# Altium PCB MiniRobot.PcbDoc
Units mm, origin at the board's own origin, x right, y up, seen from the top; angles counter-clockwise.
Board outline 90 x 85 mm, 2 copper layers (Top Layer, Bottom Layer); 54 components, 48 nets, 197 pads, 64 vias.
Unrouted connection lines stored in the file: 22.
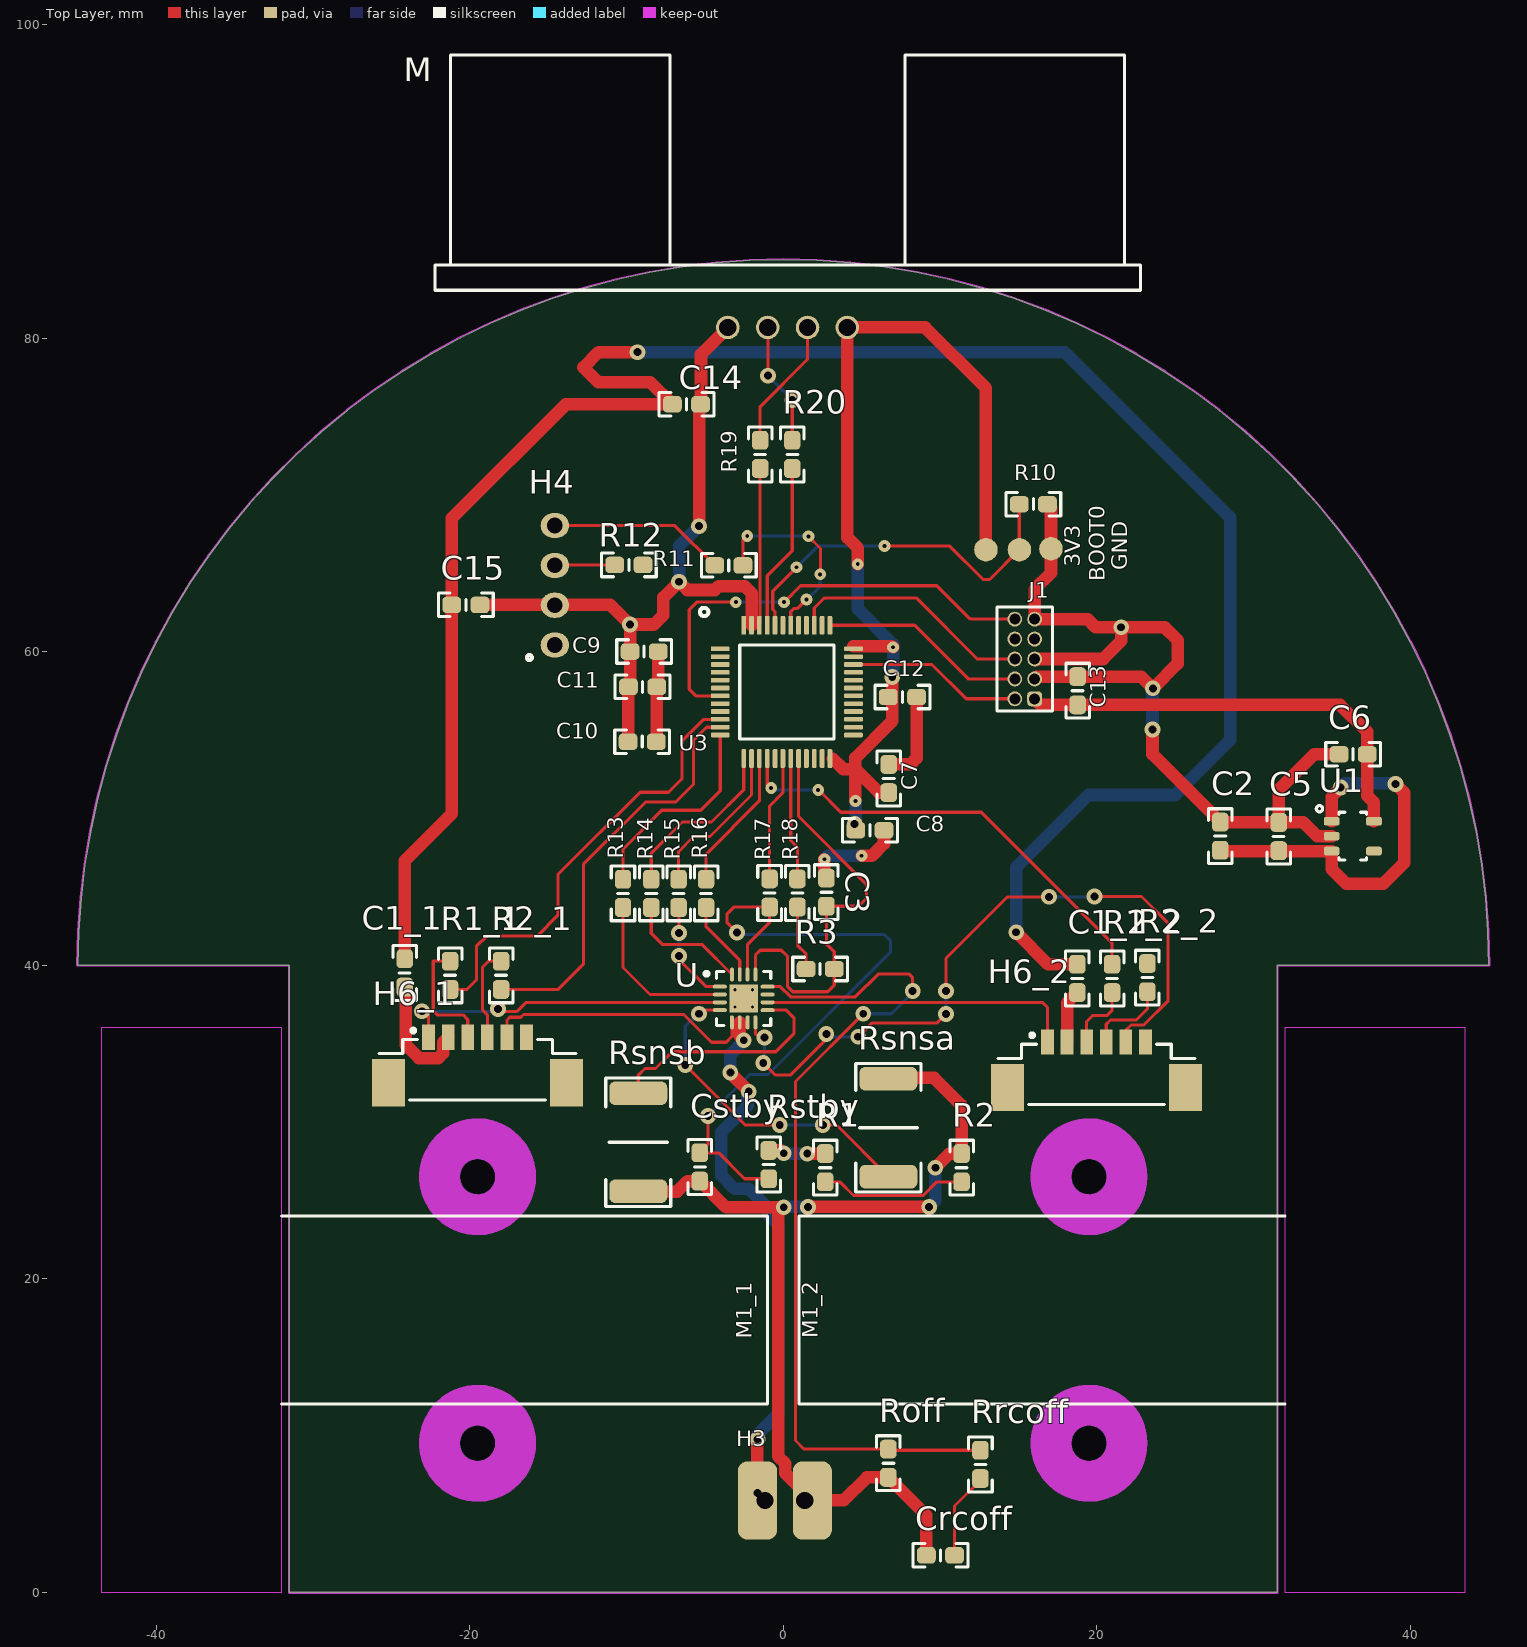
[diagram p0: Top Layer view]
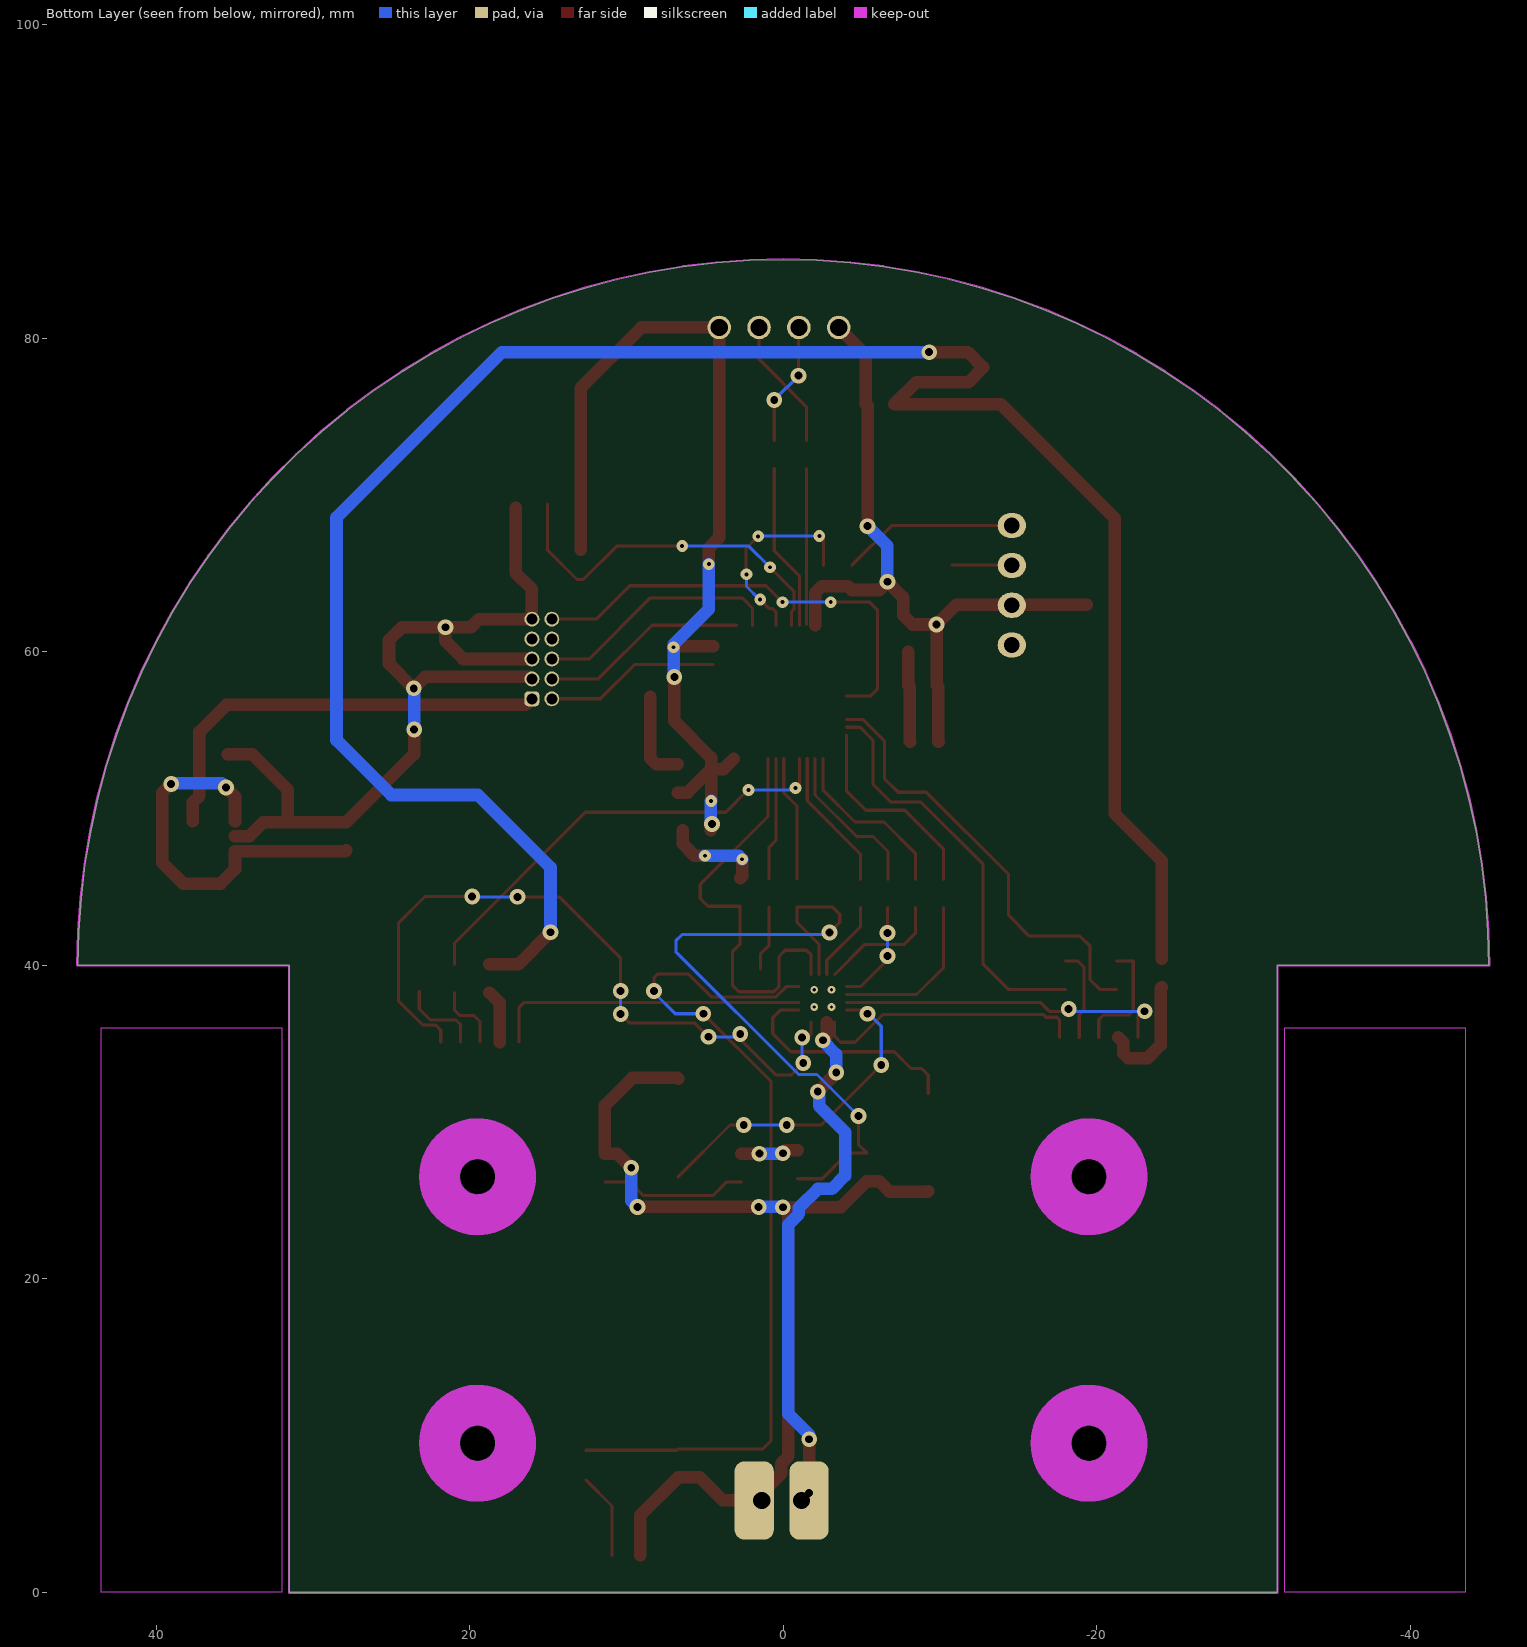
[diagram p1: Bottom Layer view, seen from below]

## Layer stack, top to bottom
Top Solder: solder mask 0.0102, Solder Resist, Dk 3.5
Top Layer: signal copper 0.0356
Dielectric 1: dielectric 0.32, FR-4, Dk 4.8
Bottom Layer: signal copper 0.0356
Bottom Solder: solder mask 0.0102, Solder Resist, Dk 3.5

## Board outline
45,40 44.949,42.141 44.796,44.278 44.542,46.404 44.187,48.516 43.732,50.609 43.177,52.678 42.525,54.718 41.777,56.725 40.933,58.694 39.998,60.62 38.971,62.5 37.856,64.329 36.656,66.103 35.372,67.817 34.009,69.469 32.568,71.054 31.054,72.568 29.469,74.009 27.817,75.372 26.103,76.656 24.329,77.856 22.5,78.971 20.62,79.998 18.694,80.933 16.725,81.777 14.718,82.525 12.678,83.177 10.609,83.732 8.516,84.187 6.404,84.542 4.278,84.796 2.141,84.949 0,85 -2.141,84.949 -4.278,84.796 -6.404,84.542 -8.516,84.187 -10.609,83.732 -12.678,83.177 -14.718,82.525 -16.725,81.777 -18.694,80.933 -20.62,79.998 -22.5,78.971 -24.329,77.856 -26.103,76.656 -27.817,75.372 -29.469,74.009 -31.054,72.568 -32.568,71.054 -34.009,69.469 -35.372,67.817 -36.656,66.103 -37.856,64.329 -38.971,62.5 -39.998,60.62 -40.933,58.694 -41.777,56.725 -42.525,54.718 -43.177,52.678 -43.732,50.609 -44.187,48.516 -44.542,46.404 -44.796,44.278 -44.949,42.141 -45,40 -31.5,40 -31.5,0 31.5,0 31.5,40

## Design rules (kind name [scope] priority, off if disabled: settings)
Clearance [All] p1: gap=0.125
ComponentClearance [All] p1 off: gap=0.254 collisioncheckmode=3 verticalgap=0.254 showdistances=FALSE
HoleSize [All] p1: absolutevalues=TRUE maxlimit=10 minlimit=0.19 maxpercent=80.000 minpercent=20.000
MinimumAnnularRing [All] p1: minimumring=0.076
MinimumSolderMaskSliver [All] p1: minsoldermaskwidth=0.154
PolygonConnect [All] p1: connectstyle=Relief reliefconductorwidth=0.254 reliefentries=4 polygonreliefangle="45 Angle" airgapwidth=0.254
RoomDefinition U_MR_UartConnector [InComponentClass('U_MR_UartConnector')] p1: confinementstyle=ConfineIn formatcopy=TRUE lockcomponents=FALSE outline 37.125,68.4 51.751,68.4 51.751,81.4 37.125,81.4
RoomDefinition U_MR_RangeSensor [InComponentClass('U_MR_RangeSensor')] p2: confinementstyle=ConfineIn formatcopy=TRUE lockcomponents=FALSE outline 45.3,21.598 77.377,21.598 77.377,67.35 45.3,67.35
RoomDefinition U_MR_Power [InComponentClass('U_MR_Power')] p3: confinementstyle=ConfineIn formatcopy=TRUE lockcomponents=FALSE outline 46.142,13.927 60.743,13.927 60.743,20.427 46.142,20.427
RoomDefinition U_MR_Motor_Control [InComponentClass('U_MR_Motor_Control')] p4: confinementstyle=ConfineIn formatcopy=TRUE lockcomponents=FALSE outline -44.276,-22.325 49.425,-22.325 49.425,-4.575 -44.276,-4.575
RoomDefinition RightMotor [InComponentClass('RightMotor')] p5: confinementstyle=ConfineIn formatcopy=TRUE lockcomponents=FALSE outline 46.142,101.231 74.118,101.231 74.118,118.207 46.142,118.207
RoomDefinition LeftMotor [InComponentClass('LeftMotor')] p6: confinementstyle=ConfineIn formatcopy=TRUE lockcomponents=FALSE outline 46.142,82.98 72.143,82.98 72.143,99.956 46.142,99.956
RoutingVias [All] p1: holewidth=0.25 width=0.6 viastyle="Through Hole" minholewidth=0.2 minwidth=0.45 maxholewidth=1 maxwidth=2
SilkToSilkClearance [All] p1: silktosilkclearance=0.154
SilkToSolderMaskClearance [IsPad] p1: minsilkscreentomaskgap=0 clearancetoexposedcopper=TRUE
SolderMaskExpansion SolderMask_Via [IsVia] p1: expansion=-100
SolderMaskExpansion [All] p2: expansion=0.102
Width [All] p1: maxlimit=10 minlimit=0.075 preferedwidth=0.2 minimp=50.000000 maximp=50.000000 favimp=50.000000
24 further rules are at their usual default settings.

## Classes and differential pairs
channel class MR_Motor: LeftMotor RightMotor
component class U_MR_Power: C5 C6 H3 U1
component class RightMotor: C1_2 H6_2 M1_2 R1_2 R2_2
component class LeftMotor: C1_1 H6_1 M1_1 R1_1 R2_1
component class U_MR_Mcu: 3V3 BOOT0 C7 C8 C9 C10 C11 C12 C13 GND J1 R10 R11 R13 R14 R15 R16 R17 R18 R19 U3
component class U_MR_Motor_Control: C2 C3 Crcoff Cstby R1 R2 R3 Roff Rrcoff Rsnsa Rsnsb Rstby U
component class U_MR_RangeSensor: C14 M R20
component class U_MR_UartConnector: C15 H4 R12

## Components (designator, comment, footprint, x,y, rotation, side; value= is the part's Value field where it differs from the comment)
3V3 "TestPoint" ROUND_TEST_POINT 12.925,66.5 r180 top
BOOT0 "TestPoint" ROUND_TEST_POINT 15.063,66.5 r270 top
C1_1 "CerCap" 0603_CAP_LD -24.15,39.5 r90 top (schematic designator C1)
C1_2 "CerCap" 0603_CAP_LD 18.75,39.15 r90 top (schematic designator C1)
C2 "CerCap" 0603_CAP_LD 27.875,48.225 r270 top
C3 "CerCap" 0603_CAP_LD 2.75,44.65 r270 top
C5 "CerCap" 0603_CAP_LD 31.6,48.2 r270 top
C6 "CerCap" 0603_CAP_LD 36.35,53.45 r0 top
C7 "CerCap" 0603_CAP_LD 6.725,51.9 r270 top
C8 "CerCap" 0603_CAP_LD 5.525,48.6 r180 top
C9 "CerCap" 0603_CAP_LD -8.875,60 r0 top
C10 "CerCap" 0603_CAP_LD -9,54.25 r0 top
C11 "CerCap" 0603_CAP_LD -8.975,57.75 r0 top
C12 "CerCap" 0603_CAP_LD 7.6,57.1 r180 top
C13 "CerCap" 0603_CAP_LD 18.775,57.5 r270 top
C14 "CerCap" 0603_CAP_LD -6.175,75.775 r180 top
C15 "CerCap" 0603_CAP_LD -20.25,62.975 r180 top
Crcoff "CerCap" 0603_CAP_LD 10.025,2.35 r0 top
Cstby "CerCap" 0603_CAP_LD -5.325,27.125 r90 top
GND "TestPoint" ROUND_TEST_POINT 17.075,66.55 r90 top
H3 "CustomBatteryConnector" CUSTOMBATTERYCONNECTOR 0.105,5.85 r0 top
H4 "Header" "HE14 1x4 Straight" -14.575,64.225 r90 top
H6_1 "Header" HEADER_1X6_PICOBLADE_653106124022 -19.5,33.325 r0 top (schematic designator H6)
H6_2 "Header" HEADER_1X6_PICOBLADE_653106124022 19.975,33.025 r0 top (schematic designator H6)
J1 "Debug" 62201021121 15.4,59.525 r90 top
M "Ultrasonic Range Sensor" HC-SR04 0.275,80.675 r0 top
M1_1 "MotorGroup" MOTORGROUP -1,18 r0 top locked (schematic designator M1)
M1_2 "MotorGroup" MOTORGROUP 1,18 r180 top locked (schematic designator M1)
R1 "Resistor" 0603_RES_LD 2.675,27.075 r90 top
R1_1 "Resistor" 0603_RES_LD -21.25,39.35 r90 top (schematic designator R1)
R1_2 "Resistor" 0603_RES_LD 20.975,39.15 r270 top (schematic designator R1)
R2 "Resistor" 0603_RES_LD 11.375,27.075 r270 top
R2_1 "Resistor" 0603_RES_LD -18,39.35 r90 top (schematic designator R2)
R2_2 "Resistor" 0603_RES_LD 23.225,39.2 r270 top (schematic designator R2)
R3 "Resistor" 0603_RES_LD 2.35,39.75 r0 top
R10 "Resistor" 0603_RES_LD 15.95,69.4 r180 top
R11 "Resistor" 0603_RES_LD -3.475,65.495 r0 top
R12 "Resistor" 0603_RES_LD -9.85,65.525 r180 top
R13 "Resistor" 0603_RES_LD -10.225,44.575 r90 top
R14 "Resistor" 0603_RES_LD -8.425,44.575 r90 top
R15 "Resistor" 0603_RES_LD -6.675,44.575 r90 top
R16 "Resistor" 0603_RES_LD -4.925,44.575 r90 top
R17 "Resistor" 0603_RES_LD -0.875,44.6 r90 top
R18 "Resistor" 0603_RES_LD 0.9,44.6 r90 top
R19 "Resistor" 0603_RES_LD -1.475,72.575 r270 top
R20 "Resistor" 0603_RES_LD 0.575,72.575 r90 top
Roff "Resistor" 0603_RES_LD 6.7,8.225 r90 top
Rrcoff "Resistor" 0603_RES_LD 12.575,8.15 r90 top
Rsnsa "Resistor" 2512_RES_LD 6.7,29.625 r270 top
Rsnsb "Resistor" 2512_RES_LD -9.25,28.7 r90 top
Rstby "Resistor" 0603_RES_LD -0.925,27.275 r90 top
U "Dual Brush Motor Driver" QFN-STSPIN240 -2.525,37.875 r0 top
U1 "Low noise, Low Iq LDO" LP5907 36.325,48.225 r0 top
U3 "Microcontroller" STM32_LQFP48 0.225,57.425 r0 top

## Footprints (in the part's own frame and the unit in brackets; to place one, negate y for a bottom-side part, rotate by r counter-clockwise, add the part's x,y. Pads: shape width x height; smd on the part's side, far side on the other; paste and mask are expansions set on the pad)
0603_CAP_LD [mm] "0603 Capacitor Low Density"
  rrect50% 1.2x1.05 smd: 1(-0.9,0) 2(0.9,0)
  silkscreen extent -1.75,-0.75 1.75,0.75
0603_RES_LD [mm] "0603 Resistor Low Density"
  rrect50% 1.2x1.05 smd: 1(-0.9,0) 2(0.9,0)
  silkscreen extent -1.75,-0.75 1.75,0.75
2512_RES_LD [mm] "2512 Low Density Resistor"
  rrect50% 1.5x3.7 smd: 1(-3.125,0) 2(3.125,0)
  silkscreen extent -4.1,-2.07 4.1,2.07
62201021121 [mm] "Pin Header, pitch 1.27 mm, THT, Vertical, dual row, 10p"
  rrect50% 0.95x0.95 hole 0.7: 1(-2.54,-0.635)
  round 0.95 hole 0.7: 2(-2.54,0.635) 3(-1.27,-0.635) 4(-1.27,0.635) 5(0,-0.635) 6(0,0.635) 7(1.27,-0.635) 8(1.27,0.635) 9(2.54,-0.635) 10(2.54,0.635)
  silkscreen extent -3.32,-1.78 3.32,1.78, body extent -3.17,-1.7 3.18,1.7, height 5.33
CUSTOMBATTERYCONNECTOR [mm] "CustomBatteryConnector"
  rrect50% 2.5x5 smd paste-100: +(-1.75,0) -(1.75,0)
  rrect50% 2.5x5 smd far side paste-100: +(-1.75,0) -(1.75,0)
  round 1.5 hole 1.1 unplated paste-100: +(-1.27,0) -(1.27,0)
HC-SR04 [mm] "HC-SR04"
  round 1.5 hole 1.1 unplated: 1(-3.81,0) 2(-1.27,0) 3(1.27,0) 4(3.81,0)
  silkscreen extent -22.5,2.38 22.5,17.38, body extent -22.72,-0.3 22.72,17.49, height 20
"HE14 1x4 Straight" [mm] "Connector HE14 Straight 1x4"
  oval 1.6x1.8 hole 1 mask+0.102: 1(-3.81,0) 2(-1.27,0) 3(1.27,0) 4(3.81,0)
  silkscreen extent -4.77,1.47 -4.45,1.78, body extent -5.08,-1.27 5.08,1.27, height 9.5
HEADER_1X6_PICOBLADE_653106124022 [mm] "1.25mm SMT Male Vertical Shrouded Header, 6p"
  rect 0.81x1.6 smd: 1(-3.125,2.07) 2(-1.875,2.07) 3(-0.625,2.07) 4(0.625,2.07) 5(1.875,2.07) 6(3.125,2.07)
  rect 2.1x3 smd: ""(-5.675,-0.83) ""(5.675,-0.83)
  silkscreen extent -6.27,-1.92 6.27,2.62
LP5907 [mm] "LP5907 SOT23"
  rrect50% 1x0.55 smd mask+0.102: 1(-1.35,0.95) 2(-1.35,0) 3(-1.35,-0.95) 4(1.35,-0.95) 5(1.35,0.95)
  silkscreen extent -2.33,-1.52 0.88,1.95
MOTORGROUP [mm]
  round 0 hole 2.2 unplated paste+0 mask+0: 21(-18.5,8.5) 22(-18.5,-8.5)
  Keep-Out Layer circle w2.6: c-18.5,-8.5 r2.425
  Keep-Out Layer circle w2.6: c-18.5,8.5 r2.425
  Keep-Out Layer region: -31,-18 -31,18 -42.5,18 -42.5,-18
  silkscreen extent -31,-6 0,6
QFN-STSPIN240 [mm] "QFN, 16-Leads, Body 3,00x3,00mm, Pitch 0,50mm, Thermal Pad 1,80x1,80mm, IPC Low Density"
  oval 0.9x0.25 smd: 1(-1.525,0.75) 2(-1.525,0.25) 3(-1.525,-0.25) 4(-1.525,-0.75) 9(1.525,-0.75) 10(1.525,-0.25) 11(1.525,0.25) 12(1.525,0.75)
  oval 0.25x0.9 smd: 5(-0.75,-1.525) 6(-0.25,-1.525) 7(0.25,-1.525) 8(0.75,-1.525) 13(0.75,1.525) 14(0.25,1.525) 15(-0.25,1.525) 16(-0.75,1.525)
  rect 1.8x1.8 smd: 17(0,0)
  silkscreen extent -2.5,-1.73 1.73,1.73
ROUND_TEST_POINT [mm] "Small round test point"
  round 1.5 smd paste-100: 1(0,0)
STM32_LQFP48 [mm]
  rrect50% 1.2x0.3 smd: 1(-4.25,2.75) 2(-4.25,2.25) 3(-4.25,1.75) 4(-4.25,1.25) 5(-4.25,0.75) 6(-4.25,0.25) 7(-4.25,-0.25) 8(-4.25,-0.75) 9(-4.25,-1.25) 10(-4.25,-1.75) 11(-4.25,-2.25) 12(-4.25,-2.75) 25(4.25,-2.75) 26(4.25,-2.25) 27(4.25,-1.75) 28(4.25,-1.25) 29(4.25,-0.75) 30(4.25,-0.25) 31(4.25,0.25) 32(4.25,0.75) 33(4.25,1.25) 34(4.25,1.75) 35(4.25,2.25) 36(4.25,2.75)
  rrect50% 0.3x1.2 smd: 13(-2.75,-4.25) 14(-2.25,-4.25) 15(-1.75,-4.25) 16(-1.25,-4.25) 17(-0.75,-4.25) 18(-0.25,-4.25) 19(0.25,-4.25) 20(0.75,-4.25) 21(1.25,-4.25) 22(1.75,-4.25) 23(2.25,-4.25) 24(2.75,-4.25) 37(2.75,4.25) 38(2.25,4.25) 39(1.75,4.25) 40(1.25,4.25) 41(0.75,4.25) 42(0.25,4.25) 43(-0.25,4.25) 44(-0.75,4.25) 45(-1.25,4.25) 46(-1.75,4.25) 47(-2.25,4.25) 48(-2.75,4.25)
  silkscreen extent -5.54,-3 3,5.37

## Part data
C1_1 C1_2 C2 C3 C5 C6 C7 C8 C9 C10 C11 C12 C13 C14 C15 Crcoff Cstby: "Ceramic Capacitor"
H3: library part BatteryConnector, "Custom Battery Connector"
H4: library part Header_4x1, "Header 4x1 PIns"
H6_1 H6_2: library part Header_6x1, "Header 6x1 Pins"
J1: library part Cortex_10x2, "Cortex 10 pins Debug Connector"
M: library part HC-SR04
M1_1 M1_2: library part Motor
U: library part STSPIN240, "ST Dual Motor Driver"
U1: library part LP5907, "LP5907 Low Noise Low Iq LDO"
U3: library part STM32F303CBT6, "STM32F303 Microcontroller"

## Via types
v1: diameter 1, hole 0.5, Top Layer to Bottom Layer, 45 vias
v2: diameter 0.75, hole 0.25, Top Layer to Bottom Layer, 15 vias
v3: diameter 0.5, hole 0.2, Top Layer to Bottom Layer, 4 vias

## Nets (pads, with @x,y where several pads share a name; then routed paths per layer and width w, separated by ;. In a path a pad name is that pad's centre, name@x,y a point inside that pad or via, vN(x,y) a via of type N, cw(c..) or ccw(c..) an arc to the next point about the centre after c; other vN are vias at no path point)
3V3: 3V3.1 C6.2 C7.2 C8.2 C9.2 C10.2 C11.2 C12.2 C13.2 J1.1 M.4 R1.2 Rstby.2 U1.5 U3.1 U3.9 U3.24 U3.36 U3.48 | length 99.6
  Top Layer w0.8: C10.2 -8.075,54.275 C11.2 -7.975,57.85 C9.2 ; Rstby.2 -0.149,28.175 v1(0.025,28.001) ; v1(1.525,27.975) R1.2 ; 3.15,53.175 3.825,52.5 4.6,52.5 ; 4.475,60.35 6.925,60.35 v2(7,60.275) ; v1(4.55,49.002) 4.625,48.928 C8.2 ; v2(4.6,50.475) 4.6,52.5 ; v2(4.75,65.575) 4.75,66.6 4.085,67.265 M.4 9.05,80.675 12.925,76.8 3V3.1 ; C7.2 6.1,51 4.6,52.5 ; v1(6.95,58.375) 6.95,55.575 4.6,53.225 4.6,52.5 ; J1.1 16.42,56.6 C13.2 35.525,56.6 37.25,54.875 C6.2 37.25,50.8 37.675,50.375 U1.5
  Bottom Layer w0.8: v1(0.025,28.001) 0.051,27.975 v1(1.525,27.975) ; v1(4.55,49.002) 4.625,49.077 4.625,50.45 v2(4.6,50.475) ; v2(4.75,65.575) 4.75,62.7 7,60.45 v2(7,60.275) 7,58.425 v1(6.95,58.375)
BOOT0: BOOT0.1 R10.2 U3.44 | length 23.7
  Top Layer w0.2: U3.44 -0.525,62.55 -0.675,62.7 -0.675,63.85 v2(0.85,65.375) ; v2(6.45,66.725) 10.625,66.725 12.75,64.6 13.162,64.6 BOOT0.1 ; BOOT0.1@15.05,66.513 R10.2
  Bottom Layer w0.2: v2(0.85,65.375) 2.2,66.725 v2(6.45,66.725)
GND: C1_1.1 C1_2.1 C2.1 C3.1 C5.1 C6.1 C7.1 C8.1 C9.1 C10.1 C11.1 C12.1 C13.1 C14.1 C15.1 Crcoff.1 Cstby.1 GND.1 H3.- H4.2 H6_1.2 H6_2.2 J1.3 J1.5 J1.9 M.1 R2.1 R10.1 Roff.1 Rsnsa.1 Rsnsb.1 U1.2 U3.8 U3.23 U3.35 U3.47 U.7 | length 195
  Top Layer w0.8: C1_1.1 -24.076,38.526 -24.076,34.899 -23.247,34.07 -22.003,34.07 -21.695,34.378 -21.695,35.075 H6_1.2 ; C15.1 -11.025,62.975 v1(-9.775,61.725) ; C10.1 -9.875,54.275 C11.1 -9.775,57.85 C9.1 v1(-9.775,61.725) ; Rsnsb.1 -9.225,25.55 -6.775,25.55 -6.1,26.225 Cstby.1 -3.651,24.551 v1(0.025,24.551) 0.05,24.526 -0.325,24.151 -0.325,8.656 0.13,8.201 0.13,7.575 1.855,5.85 3.85,5.85 5.325,7.325 Roff.1 9.125,4.9 Crcoff.1 ; v1(-5.375,68) -5.375,75.675 C14.1 -5.25,75.8 -5.25,78.96 M.1 ; U3.47 -2.025,63.725 -2.475,64.175 -4.125,64.175 -4.375,63.925 -6.125,63.925 v1(-6.65,64.45) -7.65,63.45 -7.65,62.325 -8.25,61.725 v1(-9.775,61.725) ; v1(1.575,24.575) v1(9.3,24.575) ; v2(2.625,46.752) 2.625,45.675 C3.1 ; v2(5,46.975) 5.65,46.975 6.425,47.75 C8.1 ; Rsnsa.1 6.75,32.8 9.625,32.8 11.375,31.05 R2.1 10.6,27.975 v1(9.7,27.075) ; C7.1 8.1,52.8 8.5,53.2 C12.1 ; J1.3 16.18,58.4 C13.1 22.825,58.4 v1(23.575,57.65) 25.15,59.225 25.15,60.725 24.325,61.55 v1(21.55,61.55) ; J1.5@16.11,59.45 J1.5 20.4,59.525 21.55,60.675 v1(21.55,61.55) ; R10.1@17.075,69.175 GND.1 17.075,65.025 16.035,63.985 J1.9 19.41,62.065 19.925,61.55 v1(21.55,61.55) ; H6_2.2 18.1,37.6 C1_2.1 ; v1(23.55,55.025) 23.55,53.45 C2.1 27.9,49.1 C5.1 ; U1.2 34.05,48.225 33.175,49.1 C5.1 ; C6.1 33.875,53.45 31.6,51.175 C5.1
  Bottom Layer w0.8: v1(-6.65,64.45) -6.625,64.475 -6.625,66.75 v1(-5.375,68) ; v1(0.025,24.551) 0.049,24.575 v1(1.575,24.575) ; v2(2.625,46.752) 2.627,46.752 2.85,46.975 v2(5,46.975) ; v1(9.3,24.575) 9.7,24.975 v1(9.7,27.075) ; v1(23.55,55.025) 23.55,57.625 v1(23.575,57.65)
NetC3_2: C3.2 R3.2 U3.20 U.13 | length 27.5
  Top Layer w0.2: U.13 -1.775,40.65 -1.475,40.95 -0.125,40.95 0.275,40.55 0.275,38.625 0.6,38.3 1.625,38.3 2.825,38.3 3.25,38.725 R3.2 3.25,40.85 2.75,41.35 C3.2 4.8,43.75 5.3,44.25 5.3,45.15 0.975,49.475 U3.20
NetCrcoff_2: Crcoff.2 Rrcoff.1 | length 5.5
  Top Layer w0.2: Crcoff.2 10.925,5.5 Rrcoff.1@12.575,7.15
NetCstby_2: Cstby.2 R17.1 Rstby.1 U.14 | length 43.7
  Top Layer w0.2: v1(-4.8,30.375) -4.8,28.55 Cstby.2 -4.125,28.025 -2.475,26.375 Rstby.1 ; v1(-2.95,42.075) -3.6,42.725 -3.6,43.25 -3.15,43.7 R17.1 -0.875,42.725 -2.275,41.325 U.14
  Bottom Layer w0.2: v1(-4.8,30.375) -2.15,33.025 -0.975,33.025 6.85,40.85 6.85,41.55 6.45,41.95 -2.95,41.95 v1(-2.95,42.075)
NetH4_3: H4.3 R12.2 | length 3.8
  Top Layer w0.2: H4.3 -14.545,65.525 R12.2
NetH4_4: H4.4 R11.1 | length 11.3
  Top Layer w0.2: H4.4 -6.915,68.035 R11.1
NetH6_1_1: H6_1.1 U.3 | length 21.3
  Top Layer w0.2: v1(-23.051,37.052) -22.978,37.125 -22.625,36.772 H6_1.1 ; v1(-18.201,37.202) -18.049,37.05 -16.975,37.05 -16.4,37.625 U.3
  Bottom Layer w0.2: v1(-23.051,37.052) -23.049,37.05 -18.353,37.05 v1(-18.201,37.202)
NetH6_1_3: H6_1.3 R1_1.2 | length 7.8
  Top Layer w0.2: R1_1.2 -22.325,40.25 -22.325,37.075 -22.075,36.825 -20.425,36.825 -20.125,36.525 H6_1.3
NetH6_1_4: H6_1.4 R2_1.2 | length 5.9
  Top Layer w0.2: H6_1.4 -18.875,36.825 -19.175,37.125 -19.175,39.875 -18.8,40.25 R2_1.2
NetH6_1_5: H6_1.5 U.5 | length 17.4
  Top Layer w0.2: H6_1.5 -17.625,36.5 -17.45,36.675 -16.75,36.675 -16.575,36.85 -6.35,36.85 -4.575,35.075 -3.65,35.075 -3.275,35.45 U.5
NetH6_2_1: H6_2.1 U.10 | length 20.2
  Top Layer w0.2: U.10 3.675,37.625 16.525,37.625 16.85,37.3 H6_2.1
NetH6_2_3: H6_2.3 R1_2.2 | length 4.4
  Top Layer w0.2: H6_2.3 19.35,36.4 19.725,36.775 20.625,36.775 20.975,37.125 R1_2.2
NetH6_2_4: H6_2.4 R2_2.2 | length 5.3
  Top Layer w0.2: H6_2.4 20.6,36.225 20.875,36.5 22.525,36.5 23.225,37.2 R2_2.2
NetH6_2_5: H6_2.5 U.8 | length 46.5
  Top Layer w0.2: U.8 -1.775,35.625 -1.35,35.2 -1.2,35.35 v1(-1.2,35.377) ; v1(-1.275,33.75) -0.525,33 0.475,33 2.875,35.4 2.875,35.477 v1(2.75,35.602) ; v1(4.775,35.425) 5.65,36.3 9.8,36.3 v1(10.375,36.875) ; v1(10.375,38.35) 10.375,40.425 14.3,44.35 v1(16.95,44.35) ; v1(19.85,44.375) 22.85,44.375 24.55,42.675 24.55,37.725 23,36.175 22.175,36.175 21.85,35.85 H6_2.5
  Bottom Layer w0.2: v1(-1.275,33.75) -1.2,33.825 v1(-1.2,35.377) ; v1(2.75,35.602) 2.927,35.425 v1(4.775,35.425) ; v1(10.375,36.875) v1(10.375,38.35) ; v1(16.95,44.35) 19.875,44.35 v1(19.85,44.375)
NetM_2: M.2 R20.2 | length 7.9
  Top Layer w0.2: M.2 -0.975,80.655 v1(-0.975,77.6) ; R20.2 v1(0.575,76.05)
  Bottom Layer w0.2: M.2 M.2@-0.975,80.655 ; v1(-0.975,77.6) v1(0.575,76.05)
NetM_3: M.3 R19.1 | length 8.5
  Top Layer w0.2: R19.1 -1.475,75.625 1.545,78.645 M.3
NetR1_1: R1.1 R2.2 U.11 | length 9.4
  Top Layer w0.2: R1.1 3.6,26.175 4.475,25.3 8.925,25.3 9.8,26.175 R2.2
NetR1_1_1: R1_1.1 U3.10 | length 28.5
  Top Layer w0.2: R1_1.1 -20.175,38.45 -19.575,39.05 -19.575,41.2 -18.925,41.85 -15.7,41.85 -14.375,43.175 -14.375,45.775 -9.125,51.025 -7.325,51.025 -6.45,51.9 -6.45,54.3 -5.075,55.675 U3.10
NetR1_2_1: R1_2.1 U3.16 | length 29.3
  Top Layer w0.2: U3.16 -1.025,51.475 -0.853,51.303 v2(-0.775,51.303) ; v2(2.225,51.175) 2.225,51.2 3.675,49.75 12.625,49.75 20.975,41.4 R1_2.1
  Bottom Layer w0.2: v2(-0.775,51.303) -0.75,51.303 -0.623,51.175 v2(2.225,51.175)
NetR2_1_1: R2_1.1 U3.11 | length 26.3
  Top Layer w0.2: R2_1.1 -14.35,38.45 -12.75,40.05 -12.75,46.425 -8.775,50.4 -6.85,50.4 -5.725,51.525 -5.725,54.35 -4.9,55.175 U3.11
NetR2_2_1: R2_2.1 U3.17
NetR3_1: R3.1 R18.1 | length 4.2
  Top Layer w0.2: R18.1 0.9,41.275 1.45,40.725 R3.1
NetR11_2: R11.2 U3.42 | length 12.8
  Top Layer w0.2: R11.2 -2.575,67.1 v2(-2.3,67.375) ; U3.42 0.475,62.55 0.663,62.737 0.884,62.737 v2(1.475,63.328) ; v2(1.6,67.35) 2.375,66.575 2.375,64.925 v2(2.35,64.925)
  Bottom Layer w0.2: v2(-2.3,67.375) 1.6,67.375 v2(1.6,67.35) ; v2@1.528,63.328 2.35,64.15 v2(2.35,64.925)
NetR12_1: R12.1 U3.43
NetR13_1: R13.1 U.2 | length 10.7
  Top Layer w0.2: R13.1 -10.225,39.85 -8.5,38.125 U.2
NetR13_2: R13.2 U3.12 | length 13.2
  Top Layer w0.2: R13.2 -10.225,47.4 -7.75,49.875 -5.275,49.875 -4.025,51.125 U3.12
NetR14_1: R14.1 U.16 | length 7.9
  Top Layer w0.2: R14.1 -8.425,42.025 -7.725,41.325 -5.2,41.325 U.16
NetR14_2: R14.2 U3.13 | length 11.2
  Top Layer w0.2: R14.2 -8.425,47.125 -6.425,49.125 -4.575,49.125 -2.525,51.175 U3.13
NetR15_1: R15.1 U.1 | length 6.7
  Top Layer w0.2: R15.1 -6.65,43.65 v1(-6.65,42.052) ; v1(-6.65,40.577) -6.65,40.35 -4.925,38.625 U.1
  Bottom Layer w0.2: v1(-6.65,40.577) v1@-6.65,40.775 ; v1@-6.65,40.776 v1@-6.65,42.052
NetR15_2: R15.2 U3.14 | length 10.2
  Top Layer w0.2: R15.2 -6.675,47.25 -5.725,48.2 -4.675,48.2 -2.025,50.85 U3.14
NetR16_1: R16.1 U.15 | length 5.2
  Top Layer w0.2: R16.1 -4.925,42.45 -2.775,40.3 U.15
NetR16_2: R16.2 U3.15 | length 9.1
  Top Layer w0.2: R16.2 -4.925,47.075 -1.525,50.475 U3.15
NetR17_2: R17.2 U3.18 | length 8
  Top Layer w0.2: R17.2 -0.875,50.15 -0.025,51 U3.18
NetR18_2: R18.2 U3.19 | length 7.9
  Top Layer w0.2: U3.19 0.475,47.95 0.9,47.525 R18.2
NetR19_2: R19.2 U3.46 | length 10
  Top Layer w0.2: U3.46@-1.475,61.725 R19.2
NetR20_1: R20.1 U3.45 | length 10.7
  Top Layer w0.2: U3.45 -1.025,64.825 0.575,66.425 R20.1
NetRoff_2: Roff.2 Rrcoff.2 U.12 | length 55.9
  Top Layer w0.2: U.12 -0.185,38.625 0.465,37.975 4.6,37.975 6.05,39.425 8.025,39.425 8.25,39.2 v1(8.25,38.352) ; v1(5.1,36.9) 0.775,32.575 0.775,9.675 1.325,9.125 Roff.2 6.775,9.05 Rrcoff.2
  Bottom Layer w0.2: v1(5.1,36.9) 6.9,36.9 8.25,38.25 v1(8.25,38.352)
NetRsnsa_2: Rsnsa.2 U.4 | length 21.1
  Top Layer w0.2: v1(-6.25,33.625) -2.425,29.8 v1(-0.225,29.8) ; v1(-5.375,36.9) -5.375,37 -5.25,37.125 U.4 ; v1(2.525,29.8) 3.4,29.8 Rsnsa.2
  Bottom Layer w0.2: v1(-6.25,33.625) -6.25,36.1 -5.45,36.9 v1(-5.375,36.9) ; v1(-0.225,29.8) v1(2.525,29.8)
NetRsnsb_2: Rsnsb.2 U.9 | length 15.1
  Top Layer w0.2: Rsnsb.2 -9.25,32.975 -8.825,33.4 -8.148,33.4 -7.073,34.475 -0.477,34.475 0.675,35.627 0.675,36.65 0.2,37.125 U.9
nRST: J1.10 U3.7 | length 29.5
  Top Layer w0.2: U3.7 -5.575,57.175 -6,57.6 -6,62.675 -5.525,63.15 v2(-3.025,63.15) ; v2(0.05,63.15) 1.1,64.2 9.8,64.2 11.935,62.065 J1.10
  Bottom Layer w0.2: v2(-3.025,63.15) v2(0.05,63.15)
SWCLK: J1.4 U3.37 | length 13.2
  Top Layer w0.2: U3.37 8.375,61.675 11.795,58.255 J1.4
SWDIO: J1.2 U3.34 | length 11.2
  Top Layer w0.2: U3.34 9.475,59.175 11.665,56.985 J1.2
SWO: J1.6 U3.39 | length 15.8
  Top Layer w0.2: U3.39 1.975,62.775 2.625,63.425 8.475,63.425 12.375,59.525 J1.6
VBATT: C2.2 C5.2 H3.+ H4.1 U1.1 U1.3 U.6 | length 60.1
  Top Layer w0.8: v1(-3.375,33.15) -3.375,33.101 v1(-2.2,31.927) ; U.6 -2.775,35.452 v1(-2.525,35.202) ; v1(-1.65,6.335) v1(-1.65,9.75) ; C2.2 27.925,47.275 U1.3 34.975,46.125 35.9,45.2 38.275,45.2 39.6,46.525 39.6,51 v1(39.05,51.55) ; U1.1 34.975,50.75 v1(35.55,51.325)
  Bottom Layer w0.8: v1(-3.375,33.15) -3.375,34.3 -2.525,35.15 v1(-2.525,35.202) ; v1(-2.2,31.927) -2.283,31.844 -2.283,31.017 -3.95,29.35 -3.95,26.575 -3.1,25.725 -2.2,25.725 -1,24.525 -1,24.127 -0.325,23.452 -0.325,11.375 -1.65,10.05 v1(-1.65,9.75) ; v1(-1.65,6.335) H3.+@-1.165,5.85 ; v1(35.55,51.325) 35.825,51.6 39.05,51.6 v1(39.05,51.55)
VCC: C1_1.2 C1_2.2 C14.2 C15.2 | length 139.2
  Top Layer w0.8: C1_1.2 -24.15,46.65 -21.15,49.65 C15.2 -21.15,68.5 -13.875,75.775 C14.2 -8.475,77.175 -11.8,77.175 -12.75,78.125 -11.775,79.1 v1(-9.3,79.1) ; v1(14.85,42.1) 16.9,40.05 C1_2.2
  Bottom Layer w0.8: v1(-9.3,79.1) 17.95,79.1 28.5,68.55 28.5,54.35 25,50.85 19.475,50.85 14.85,46.225 v1(14.85,42.1)
VRATT: H6_1.6 H6_2.6
pads on no net: H6_1. H6_2. J1.7 J1.8 M1_1.21 M1_1.22 M1_2.21 M1_2.22 U1.4 U3.2 U3.3 U3.4 U3.5 U3.6 U3.21 U3.22 U3.25 U3.26 U3.27 U3.28 U3.29 U3.30 U3.31 U3.32 U3.33 U3.38 U3.40 U3.41 U.17
copper on no net:
  other v3: -3.075,37.325 -1.975,37.325 -3.075,38.425 -1.975,38.425

## Keep-outs
Keep-Out Layer:
  lines w0.1: 44.999,42.141 ccw(c44.949,42.141) 44.999,42.142 ; -45.05,40.001 ccw(c-45,40) -45,39.95 ; -45.05,40.002 ccw(c-45,40) -45,39.95 ; -45.05,40.002 -44.999,42.142 ; -45.05,40.001 -45.05,40.002 ; -45,39.95 -31.55,39.95 -31.55,0 ; -44.999,42.142 cw(c-44.949,42.141) -44.999,42.145 ; -44.999,42.142 cw(c-44.949,42.141) -44.999,42.145 ; -44.999,42.142 -44.999,42.142 ; -44.999,42.145 -44.846,44.281 ; -44.846,44.281 cw(c-44.796,44.278) -44.846,44.283 ; -44.846,44.281 cw(c-44.796,44.278) -44.846,44.283 ; -44.846,44.283 -44.592,46.41 ; -44.592,46.41 cw(c-44.542,46.404) -44.591,46.413 ; -44.592,46.41 cw(c-44.542,46.404) -44.591,46.412 ; -44.591,46.413 -44.236,48.524 ; -44.591,46.412 -44.591,46.413 ; -44.236,48.525 cw(c-44.187,48.516) -44.236,48.527 ; -44.236,48.524 cw(c-44.187,48.516) -44.236,48.527 ; -44.236,48.524 -44.236,48.525 ; -44.236,48.527 ccw(c-44.187,48.516) -44.236,48.527 ; -44.236,48.527 -43.78,50.62 ; -44.236,48.527 -44.236,48.527 ; -44.236,48.527 -44.236,48.527 ; -43.78,50.62 cw(c-43.732,50.609) -43.78,50.622 ; -43.78,50.62 ccw(c-43.732,50.609) -43.78,50.62 ; -43.78,50.62 cw(c-43.732,50.609) -43.78,50.622 ; -43.78,50.62 -43.78,50.62 ; -43.78,50.62 -43.78,50.62 ; -43.78,50.622 ccw(c-43.732,50.609) -43.78,50.622 ; -43.78,50.622 -43.226,52.691 ; -43.78,50.622 -43.78,50.622 ; -43.78,50.622 -43.78,50.622 ; -43.226,52.691 cw(c-43.177,52.678) -43.225,52.693 ; -43.226,52.691 ccw(c-43.177,52.678) -43.226,52.691 ; -43.226,52.691 cw(c-43.177,52.678) -43.225,52.693 ; -43.226,52.691 -43.226,52.691 ; -43.226,52.691 -43.226,52.691 ; -43.225,52.693 -42.573,54.733 ; -42.573,54.733 cw(c-42.525,54.718) -42.572,54.735 ; -42.573,54.733 cw(c-42.525,54.718) -42.572,54.736 ; -42.572,54.736 ccw(c-42.525,54.718) -42.572,54.735 ; -42.572,54.736 -41.824,56.742 ; -42.572,54.736 -42.572,54.736 ; -42.572,54.735 -42.572,54.736 ; -41.823,56.742 cw(c-41.777,56.725) -41.823,56.744 ; -41.823,56.742 ccw(c-41.777,56.725) -41.823,56.742 ; -41.823,56.742 cw(c-41.777,56.725) -41.823,56.744 ; -41.823,56.742 -41.823,56.742 ; -41.824,56.742 -41.823,56.742 ; -41.823,56.744 -40.979,58.713 ; -40.979,58.713 cw(c-40.933,58.694) -40.979,58.715 ; -40.979,58.713 cw(c-40.933,58.694) -40.978,58.716 ; -40.979,58.715 cw(c-40.933,58.694) -40.978,58.716 ; -40.979,58.715 -40.978,58.716 ; -40.978,58.716 -40.043,60.642 ; -40.978,58.716 -40.978,58.716 ; -40.043,60.642 cw(c-39.998,60.62) -40.042,60.644 ; -40.043,60.642 cw(c-39.998,60.62) -40.043,60.642 ; -40.043,60.642 -40.043,60.642 ; -40.043,60.642 -40.043,60.642 ; -40.043,60.642 cw(c-39.998,60.62) -40.042,60.644 ; -40.042,60.644 -39.015,62.524 ; -39.015,62.524 cw(c-38.971,62.5) -39.014,62.526 ; -39.015,62.524 cw(c-38.971,62.5) -39.014,62.526 ; -39.014,62.526 -37.899,64.355 ; -37.899,64.355 cw(c-37.856,64.329) -37.898,64.357 ; -37.899,64.355 cw(c-37.856,64.329) -37.898,64.357 ; -37.898,64.357 -36.698,66.13 ; -37.898,64.357 -37.898,64.357 ; -36.697,66.131 cw(c-36.656,66.103) -36.696,66.133 ; -36.698,66.13 cw(c-36.656,66.103) -36.696,66.133 ; -36.698,66.13 -36.697,66.131 ; -36.696,66.133 -35.412,67.847 ; -35.412,67.847 cw(c-35.372,67.817) -35.411,67.849 ; -35.412,67.847 cw(c-35.372,67.817) -35.411,67.849 ; -35.411,67.849 -34.047,69.501 ; -34.047,69.501 cw(c-34.009,69.469) -34.046,69.502 ; -34.047,69.501 cw(c-34.009,69.469) -34.046,69.502 ; -34.046,69.503 ccw(c-34.009,69.469) -34.046,69.502 ; -34.046,69.503 -32.605,71.087 ; -34.046,69.502 -34.046,69.503 ; -34.046,69.502 -34.046,69.502 ; -32.605,71.087 cw(c-32.568,71.054) -32.603,71.089 ; -32.605,71.087 ccw(c-32.568,71.054) -32.605,71.087 ; -32.605,71.087 cw(c-32.568,71.054) -32.603,71.089 ; -32.605,71.087 -32.605,71.087 ; -32.605,71.087 -32.605,71.087 ; -32.603,71.089 -31.089,72.603 ; -31.55,0 ccw(c-31.5,0) -31.5,-0.05 ; -31.55,0 ccw(c-31.5,0) -31.5,-0.05 ; -31.5,-0.05 31.5,-0.05 ; -31.089,72.603 cw(c-31.054,72.568) -31.087,72.605 ; -31.089,72.603 cw(c-31.054,72.568) -31.087,72.605 ; -31.087,72.605 ccw(c-31.054,72.568) -31.087,72.605 ; -31.087,72.605 -29.503,74.046 ; -31.087,72.605 -31.087,72.605 ; -31.087,72.605 -31.087,72.605 ; -29.503,74.046 cw(c-29.469,74.009) -29.502,74.046 ; -29.503,74.046 -29.502,74.046 ; -29.502,74.046 cw(c-29.469,74.009) -29.501,74.047 ; -29.502,74.046 cw(c-29.469,74.009) -29.501,74.047 ; -29.502,74.046 -29.502,74.046 ; -29.501,74.047 -27.849,75.411 ; -27.849,75.411 cw(c-27.817,75.372) -27.847,75.412 ; -27.849,75.411 cw(c-27.817,75.372) -27.847,75.412 ; -27.847,75.412 -26.133,76.696 ; -26.133,76.696 cw(c-26.103,76.656) -26.13,76.698 ; -26.133,76.696 cw(c-26.103,76.656) -26.131,76.697 -26.13,76.698 ; -26.13,76.698 -24.357,77.898 ; -24.357,77.898 cw(c-24.329,77.856) -24.355,77.899 ; -24.357,77.898 cw(c-24.329,77.856) -24.355,77.899 ; -24.357,77.898 -24.357,77.898 ; -24.355,77.899 -22.526,79.014 ; -22.526,79.014 cw(c-22.5,78.971) -22.524,79.015 ; -22.526,79.014 cw(c-22.5,78.971) -22.524,79.015 ; -22.524,79.015 -20.644,80.041 ; -20.644,80.041 cw(c-20.62,79.998) -20.642,80.042 ; -20.644,80.041 cw(c-20.62,79.998) -20.642,80.043 ; -20.642,80.042 cw(c-20.62,79.998) -20.642,80.043 ; -20.642,80.043 -20.642,80.043 ; -20.642,80.042 -20.642,80.043 ; -20.642,80.043 -18.716,80.978 ; -18.716,80.978 cw(c-18.694,80.933) -18.713,80.979 ; -18.715,80.979 ccw(c-18.694,80.933) -18.716,80.978 ; -18.715,80.979 cw(c-18.694,80.933) -18.713,80.979 ; -18.716,80.978 -18.715,80.979 ; -18.716,80.978 -18.716,80.978 ; -18.713,80.979 -16.745,81.823 ; -16.745,81.823 cw(c-16.725,81.777) -16.742,81.823 ; -16.745,81.823 cw(c-16.725,81.777) -16.742,81.823 ; -16.742,81.823 cw(c-16.725,81.777) -16.742,81.823 ; -16.742,81.823 -16.742,81.823 ; -16.742,81.823 -16.742,81.823 ; -16.742,81.823 -14.736,82.572 ; -14.736,82.572 cw(c-14.718,82.525) -14.735,82.572 ; -14.736,82.572 -14.736,82.572 ; -14.736,82.572 cw(c-14.718,82.525) -14.733,82.573 ; -14.735,82.572 cw(c-14.718,82.525) -14.733,82.573 ; -14.736,82.572 -14.735,82.572 ; -14.733,82.573 -12.693,83.225 ; -12.693,83.225 cw(c-12.678,83.177) -12.691,83.225 ; -12.693,83.225 cw(c-12.678,83.177) -12.691,83.226 ; -12.691,83.225 cw(c-12.678,83.177) -12.691,83.226 ; -12.691,83.225 -12.691,83.226 ; -12.691,83.226 -10.622,83.78 ; -12.691,83.226 -12.691,83.226 ; -10.622,83.78 cw(c-10.609,83.732) -10.622,83.78 ; -10.622,83.78 -10.622,83.78 ; -10.622,83.78 cw(c-10.609,83.732) -10.62,83.78 ; -10.622,83.78 cw(c-10.609,83.732) -10.62,83.78 ; -10.622,83.78 -10.622,83.78 ; -10.62,83.78 -8.527,84.236 ; -8.527,84.236 cw(c-8.516,84.187) -8.524,84.236 ; -8.527,84.236 cw(c-8.516,84.187) -8.525,84.236 -8.524,84.236 ; -8.524,84.236 -6.413,84.591 ; -6.412,84.591 cw(c-6.404,84.542) -6.41,84.592 ; -6.413,84.591 cw(c-6.404,84.542) -6.41,84.592 ; -6.413,84.591 -6.412,84.591 ; -6.41,84.592 -4.283,84.846 ; -4.283,84.846 cw(c-4.278,84.796) -4.281,84.846 ; -4.283,84.846 cw(c-4.278,84.796) -4.281,84.846 ; -4.281,84.846 -2.145,84.999 ; -2.145,84.999 cw(c-2.141,84.949) -2.142,84.999 ; -2.145,84.999 cw(c-2.141,84.949) -2.142,84.999 -2.142,84.999 ; -2.142,84.999 -0.002,85.05 ; -0.001,85.05 cw(c0,85) 0.002,85.05 ; -0.002,85.05 cw(c0,85) 0.001,85.05 0.002,85.05 ; -0.002,85.05 -0.001,85.05 ; 0.002,85.05 2.142,84.999 ; 2.142,84.999 cw(c2.141,84.949) 2.145,84.999 ; 2.142,84.999 cw(c2.141,84.949) 2.145,84.999 ; 2.142,84.999 2.142,84.999 ; 2.145,84.999 4.281,84.846 ; 4.281,84.846 cw(c4.278,84.796) 4.283,84.846 ; 4.281,84.846 cw(c4.278,84.796) 4.283,84.846 ; 4.283,84.846 6.41,84.592 ; 6.41,84.592 cw(c6.404,84.542) 6.413,84.591 ; 6.41,84.592 cw(c6.404,84.542) 6.412,84.591 ; 6.413,84.591 8.524,84.236 ; 6.412,84.591 6.413,84.591 ; 8.524,84.236 cw(c8.516,84.187) 8.527,84.236 ; 8.524,84.236 8.525,84.236 cw(c8.516,84.187) 8.527,84.236 ; 8.527,84.236 cw(c8.516,84.187) 8.527,84.236 ; 8.527,84.236 8.527,84.236 ; 8.527,84.236 10.62,83.78 ; 8.527,84.236 8.527,84.236 ; 10.62,83.78 cw(c10.609,83.732) 10.622,83.78 ; 10.62,83.78 ccw(c10.609,83.732) 10.62,83.78 ; 10.62,83.78 cw(c10.609,83.732) 10.622,83.78 ; 10.62,83.78 10.62,83.78 ; 10.62,83.78 10.62,83.78 ; 10.622,83.78 ccw(c10.609,83.732) 10.622,83.78 ; 10.622,83.78 12.691,83.226 ; 10.622,83.78 10.622,83.78 ; 10.622,83.78 10.622,83.78 ; 12.691,83.226 cw(c12.678,83.177) 12.693,83.225 ; 12.691,83.225 ccw(c12.678,83.177) 12.691,83.226 ; 12.691,83.225 cw(c12.678,83.177) 12.693,83.225 ; 12.691,83.226 12.691,83.225 ; 12.691,83.226 12.691,83.226 ; 12.693,83.225 14.733,82.573 ; 14.733,82.573 cw(c14.718,82.525) 14.735,82.572 ; 14.733,82.573 cw(c14.718,82.525) 14.736,82.572 ; 14.736,82.572 ccw(c14.718,82.525) 14.735,82.572 ; 14.736,82.572 16.742,81.823 ; 14.736,82.572 14.736,82.572 ; 14.735,82.572 14.736,82.572 ; 16.742,81.823 cw(c16.725,81.777) 16.744,81.823 ; 16.742,81.823 ccw(c16.725,81.777) 16.742,81.823 ; 16.742,81.823 cw(c16.725,81.777) 16.744,81.823 ; 16.742,81.823 16.742,81.823 ; 16.742,81.823 16.742,81.823 ; 16.744,81.823 18.713,80.979 ; 18.713,80.979 cw(c18.694,80.933) 18.715,80.979 ; 18.713,80.979 cw(c18.694,80.933) 18.716,80.978 ; 18.716,80.978 ccw(c18.694,80.933) 18.715,80.979 ; 18.716,80.978 20.642,80.043 ; 18.716,80.978 18.716,80.978 ; 18.715,80.979 18.716,80.978 ; 20.642,80.042 ccw(c20.62,79.998) 20.642,80.043 ; 20.642,80.042 cw(c20.62,79.998) 20.644,80.042 ; 20.642,80.042 20.642,80.043 ; 20.642,80.043 cw(c20.62,79.998) 20.644,80.042 ; 20.642,80.043 20.642,80.043 ; 20.644,80.042 22.524,79.015 ; 22.524,79.015 cw(c22.5,78.971) 22.526,79.014 ; 22.524,79.015 cw(c22.5,78.971) 22.526,79.014 ; 22.526,79.014 24.355,77.899 ; 24.355,77.899 cw(c24.329,77.856) 24.357,77.898 ; 24.355,77.899 cw(c24.329,77.856) 24.357,77.898 ; 24.357,77.898 26.13,76.698 ; 24.357,77.898 24.357,77.898 ; 26.13,76.698 cw(c26.103,76.656) 26.133,76.696 ; 26.13,76.698 26.131,76.697 cw(c26.103,76.656) 26.133,76.696 ; 26.133,76.696 27.847,75.412 ; 27.847,75.412 cw(c27.817,75.372) 27.849,75.411 ; 27.847,75.412 cw(c27.817,75.372) 27.849,75.411 ; 27.849,75.411 29.501,74.047 ; 29.501,74.047 cw(c29.469,74.009) 29.502,74.046 ; 29.501,74.047 cw(c29.469,74.009) 29.502,74.046 ; 29.502,74.046 cw(c29.469,74.009) 29.503,74.046 ; 29.502,74.046 29.502,74.046 ; 29.503,74.046 31.087,72.605 ; 29.503,74.046 29.502,74.046 ; 31.087,72.605 cw(c31.054,72.568) 31.087,72.605 ; 31.087,72.605 31.087,72.605 ; 31.087,72.605 cw(c31.054,72.568) 31.089,72.603 ; 31.087,72.605 cw(c31.054,72.568) 31.089,72.603 ; 31.087,72.605 31.087,72.605 ; 31.089,72.603 32.603,71.089 ; 31.5,-0.05 ccw(c31.5,0) 31.55,0 ; 31.5,-0.05 ccw(c31.5,0) 31.55,0 ; 31.55,0 31.55,39.95 45,39.95 ; 32.603,71.089 cw(c32.568,71.054) 32.605,71.087 ; 32.603,71.089 cw(c32.568,71.054) 32.605,71.087 ; 32.605,71.087 ccw(c32.568,71.054) 32.605,71.087 ; 32.605,71.087 32.605,71.087 ; 32.605,71.087 32.605,71.087 ; 32.605,71.087 34.046,69.503 ; 34.046,69.502 cw(c34.009,69.469) 34.047,69.501 ; 34.046,69.502 ccw(c34.009,69.469) 34.046,69.503 ; 34.046,69.502 cw(c34.009,69.469) 34.047,69.501 ; 34.046,69.503 34.046,69.502 ; 34.046,69.502 34.046,69.502 ; 34.047,69.501 35.411,67.849 ; 35.411,67.849 cw(c35.372,67.817) 35.412,67.847 ; 35.411,67.849 cw(c35.372,67.817) 35.412,67.847 ; 35.412,67.847 36.696,66.133 ; 36.696,66.133 cw(c36.656,66.103) 36.698,66.13 ; 36.696,66.133 cw(c36.656,66.103) 36.697,66.131 ; 36.697,66.131 36.698,66.13 ; 36.698,66.13 37.898,64.357 ; 37.898,64.357 cw(c37.856,64.329) 37.899,64.355 ; 37.898,64.357 cw(c37.856,64.329) 37.899,64.355 ; 37.898,64.357 37.898,64.357 ; 37.899,64.355 39.014,62.526 ; 39.014,62.526 cw(c38.971,62.5) 39.015,62.524 ; 39.014,62.526 cw(c38.971,62.5) 39.015,62.524 ; 39.015,62.524 40.041,60.644 ; 40.041,60.644 cw(c39.998,60.62) 40.042,60.642 ; 40.041,60.644 cw(c39.998,60.62) 40.043,60.642 ; 40.043,60.642 ccw(c39.998,60.62) 40.042,60.642 ; 40.043,60.642 40.042,60.642 ; 40.043,60.642 40.043,60.642 ; 40.043,60.642 40.978,58.716 ; 40.979,58.715 ccw(c40.933,58.694) 40.978,58.716 ; 40.979,58.715 cw(c40.933,58.694) 40.979,58.713 ; 40.979,58.715 40.978,58.716 ; 40.978,58.716 cw(c40.933,58.694) 40.979,58.713 ; 40.978,58.716 40.978,58.716 ; 40.979,58.713 41.823,56.745 ; 41.823,56.742 ccw(c41.777,56.725) 41.823,56.745 ; 41.823,56.742 ccw(c41.777,56.725) 41.823,56.742 ; 41.823,56.742 ccw(c41.777,56.725) 41.823,56.745 ; 41.823,56.742 41.823,56.742 ; 41.823,56.742 41.823,56.742 ; 41.823,56.742 42.572,54.736 ; 42.573,54.733 ccw(c42.525,54.718) 42.572,54.736 ; 42.573,54.733 ccw(c42.525,54.718) 42.572,54.735 ; 42.573,54.733 43.225,52.693 ; 42.572,54.735 ccw(c42.525,54.718) 42.572,54.736 ; 42.572,54.736 42.572,54.736 ; 42.572,54.736 42.572,54.735 ; 43.225,52.691 ccw(c43.177,52.678) 43.225,52.693 ; 43.226,52.691 ccw(c43.177,52.678) 43.225,52.691 ; 43.226,52.691 ccw(c43.177,52.678) 43.225,52.693 ; 43.225,52.691 43.226,52.691 ; 43.226,52.691 43.226,52.691 ; 43.226,52.691 43.78,50.622 ; 43.78,50.62 ccw(c43.732,50.609) 43.78,50.622 ; 43.78,50.62 ccw(c43.732,50.609) 43.78,50.62 ; 43.78,50.62 ccw(c43.732,50.609) 43.78,50.622 ; 43.78,50.62 43.78,50.62 ; 43.78,50.62 43.78,50.62 ; 43.78,50.62 44.236,48.527 ; 43.78,50.622 ccw(c43.732,50.609) 43.78,50.622 ; 43.78,50.622 43.78,50.622 ; 43.78,50.622 43.78,50.622 ; 44.236,48.524 ccw(c44.187,48.516) 44.236,48.527 ; 44.236,48.525 ccw(c44.187,48.516) 44.236,48.527 ; 44.236,48.525 44.236,48.524 ; 44.236,48.524 44.591,46.413 ; 44.236,48.527 ccw(c44.187,48.516) 44.236,48.527 ; 44.236,48.527 44.236,48.527 ; 44.236,48.527 44.236,48.527 ; 44.592,46.41 ccw(c44.542,46.404) 44.591,46.412 ; 44.592,46.41 ccw(c44.542,46.404) 44.591,46.413 ; 44.592,46.41 44.846,44.283 ; 44.591,46.413 44.591,46.412 ; 44.846,44.281 ccw(c44.796,44.278) 44.846,44.283 ; 44.846,44.281 ccw(c44.796,44.278) 44.846,44.283 ; 44.846,44.281 44.999,42.145 ; 45,39.95 ccw(c45,40) 45.05,40 ; 45,39.95 ccw(c45,40) 45.05,40 ; 44.999,42.142 ccw(c44.949,42.141) 44.999,42.145 ; 44.999,42.142 ccw(c44.949,42.141) 44.999,42.145 ; 44.999,42.142 44.999,42.142 ; 44.999,42.142 45.05,40.002 ; 45.05,40 ccw(c45,40) 45.05,40.001 ; 45.05,40 ccw(c45,40) 45.05,40.002 ; 45.05,40.002 45.05,40.001

## Silkscreen, mask and mechanical layers (free items; w line width, h text height)
Mechanical 1:
  drawing of 350 lines, arcs and shapes, not listed